# Altium PCB DONGLE01.PcbDoc
Units mil, origin at the board's own origin, x right, y up, seen from the top; angles counter-clockwise.
Board outline 2207 x 654 mil, 2 copper layers (Top, Bottom), stack 41.756 mil thick; 41 components, 27 nets, 134 pads, 83 vias.
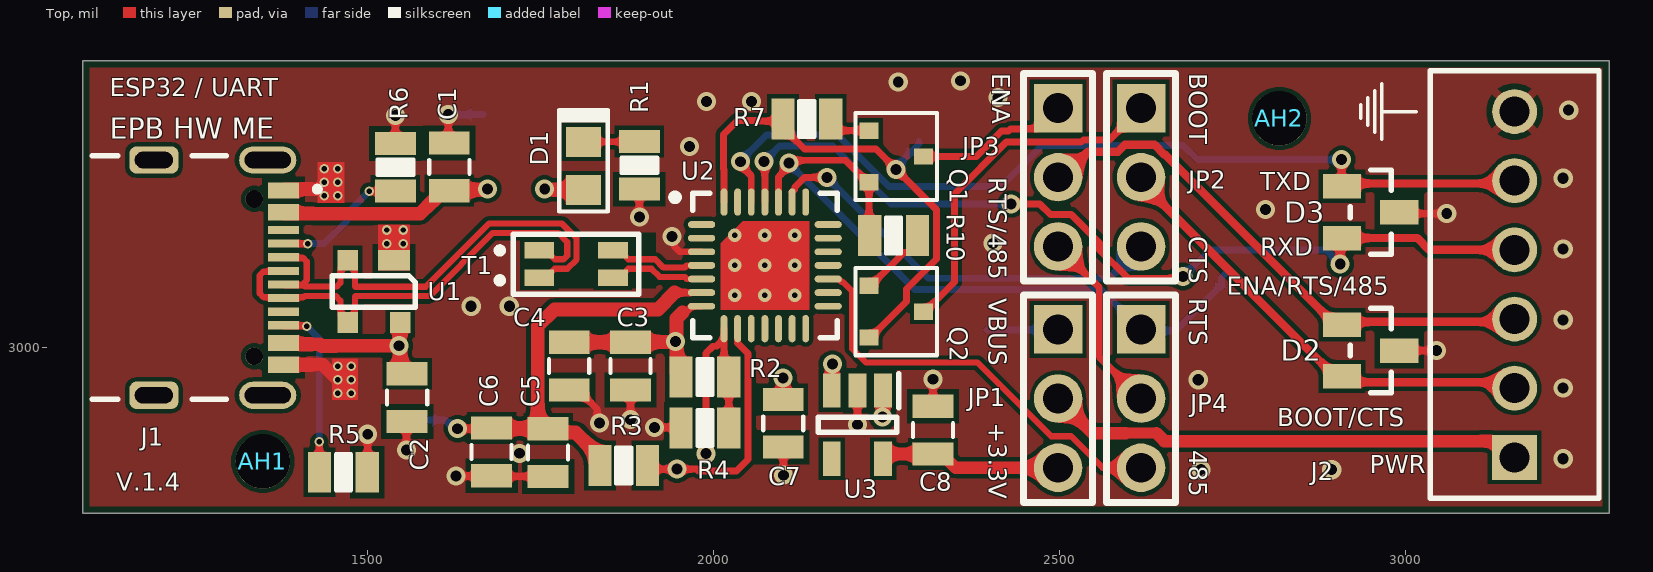
[diagram p0: Top view]
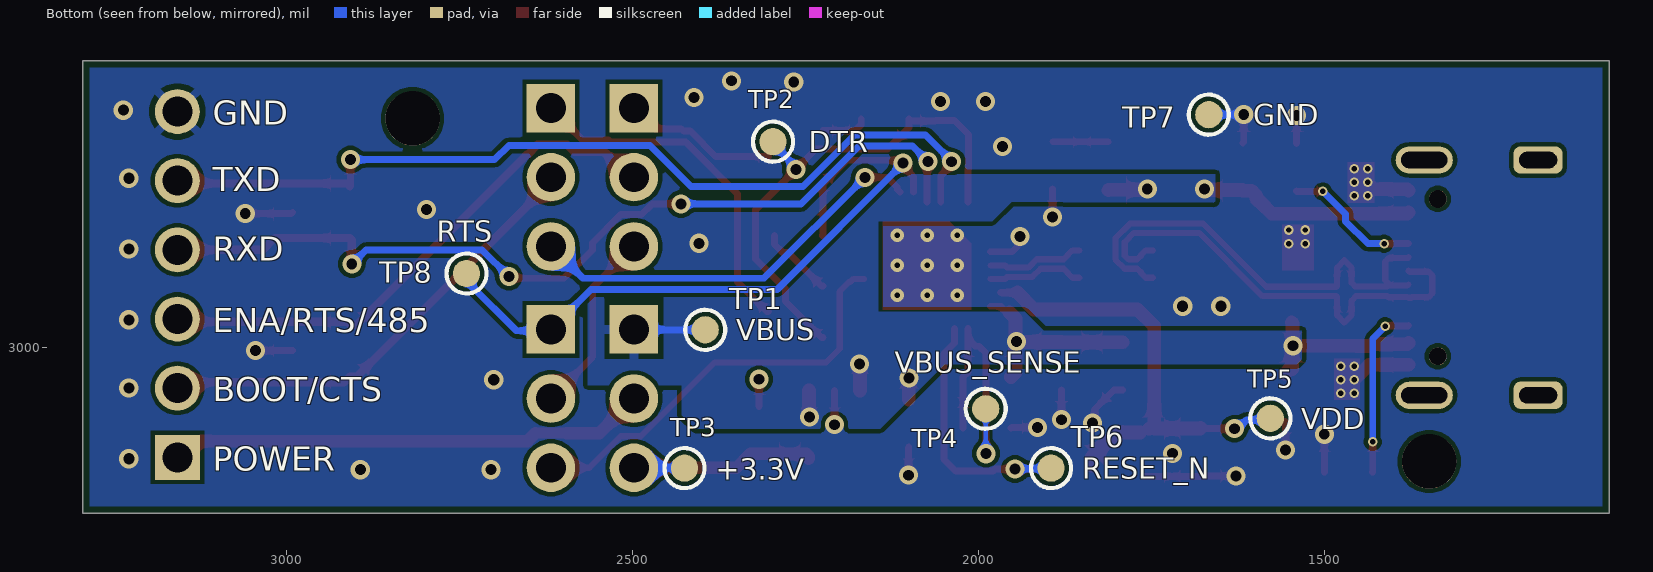
[diagram p1: Bottom view, seen from below]
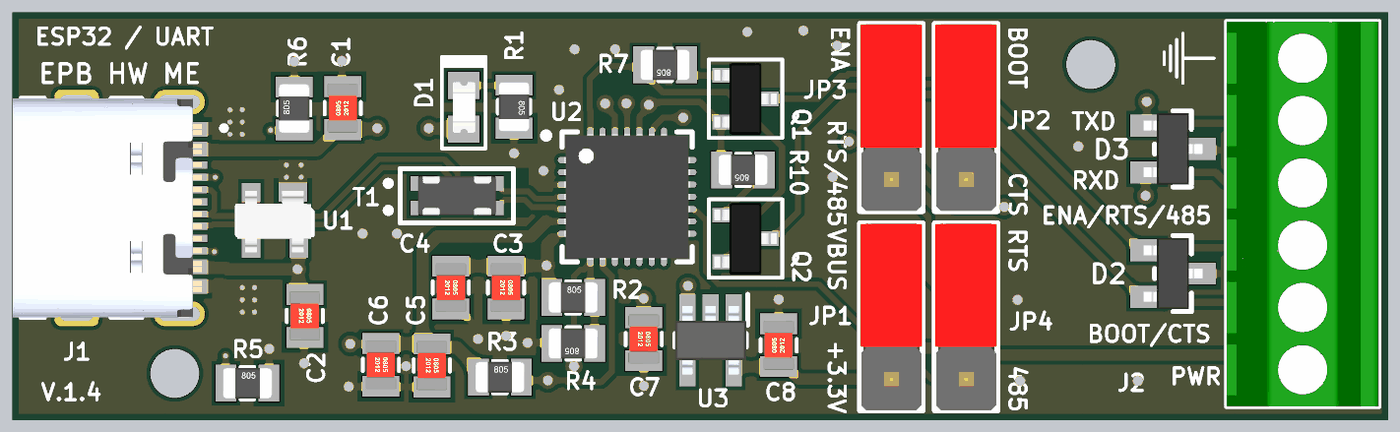
[diagram p2: 3D render of the assembled board from above, using the file's embedded part models]

## Layer stack, top to bottom
Top Solder: solder mask 1, SM-001, Dk 4
Top: signal copper 1.378
Dielectric 1: core 39, Core-042, Dk 4.6
Bottom: signal copper 1.378
Bottom Solder: solder mask 1, SM-001, Dk 4

## Board outline
1088,2760 1088,3414 3295,3414 3295,2760

## Design rules (kind name [scope] priority, off if disabled: settings)
BoardOutlineClearance [All] p1: gap=10 ignorepadtopadclearanceinfootprint=FALSE
Clearance [All vs not InAnyDifferentialPair] p1: gap=6 ignorepadtopadclearanceinfootprint=TRUE
DiffPairsRouting "Schematic Differential Pairs Routing_1" [InNetClass('USB')] p1: maxlimit=4.51 minlimit=4.51 mostfreqgap=4.51 toplayer_minwidth=9 toplayer_maxwidth=9 toplayer_prefwidth=9 bottomlayer_minwidth=9 bottomlayer_maxwidth=9 bottomlayer_prefwidth=9 impedanceprofiledriven=TRUE impedanceprofileid={0D77AD79-8F11-46E1-93D8-ED229D89D16F} impedanceprofilevalue=90.000000 maxuncoupledlength=500
DiffPairsRouting "Schematic Differential Pairs Routing" [InNetClass('USBi')] p2: maxlimit=4.51 minlimit=4.51 mostfreqgap=4.51 toplayer_minwidth=9 toplayer_maxwidth=9 toplayer_prefwidth=9 bottomlayer_minwidth=9 bottomlayer_maxwidth=9 bottomlayer_prefwidth=9 impedanceprofiledriven=TRUE impedanceprofileid={0D77AD79-8F11-46E1-93D8-ED229D89D16F} impedanceprofilevalue=90.000000 maxuncoupledlength=500
DiffPairsRouting [All] p3: maxlimit=4.51 minlimit=4.51 mostfreqgap=4.51 toplayer_minwidth=9 toplayer_maxwidth=9 toplayer_prefwidth=9 bottomlayer_minwidth=9 bottomlayer_maxwidth=9 bottomlayer_prefwidth=9 impedanceprofiledriven=TRUE impedanceprofileid={0D77AD79-8F11-46E1-93D8-ED229D89D16F} impedanceprofilevalue=90.000000 maxuncoupledlength=500
MinimumSolderMaskSliver [not InComponent('J1') and not InComponent('U2')] p1: minsoldermaskwidth=6
PolygonConnect [All] p1: thpad.connectstyle=Relief thpad.reliefconductorwidth=12 thpad.reliefentries=4 thpad.polygonreliefangle="90 Angle" thpad.airgapwidth=8 thpad.conductorbypadedge=TRUE thpad.mindistance=15 thpad.enablemindistance=FALSE smdpad.connectstyle=NoConnect smdpad.reliefconductorwidth=8 smdpad.reliefentries=4 smdpad.polygonreliefangle="90 Angle" smdpad.airgapwidth=8 via.connectstyle=Direct via.reliefconductorwidth=8 via.reliefentries=4 via.polygonreliefangle="90 Angle" via.airgapwidth=8
RoutingVias [All] p1: holewidth=15.75 width=27.56 viastyle="Through Hole" minholewidth=7.87 minwidth=13.78 maxholewidth=39.37 maxwidth=196.85
SMDEntry [All] p1: side=TRUE corner=TRUE anyangle=TRUE
SilkToSolderMaskClearance [IsPad] p1: minsilkscreentomaskgap=1 clearancetoexposedcopper=FALSE
SolderMaskExpansion Via [IsVia] p1: expansion=4 istentingtop=TRUE
SolderMaskExpansion Generic [All] p2: expansion=1 istentingtop=FALSE
SupplyNets "Schematic Supply Nets_3" [InNet('VDD')] p1: voltage=0.000
SupplyNets "Schematic Supply Nets_4" [InNet('+3.3V')] p2: voltage=0.000
SupplyNets "Schematic Supply Nets_2" [InNet('GND')] p3: voltage=0.000
SupplyNets "Schematic Supply Nets_1" [InNet('VBUS')] p4: voltage=0.000
UnRoutedNet [All] p1: checkbadconnections=TRUE
Width [All] p1: maxlimit=50 minlimit=3.94 preferedwidth=10
26 further rules are at their usual default settings.

## Classes and differential pairs
net class USB: DE_N DE_P
net class USBi: DI_N DI_P
differential pair DI: +DI_P -DI_N
differential pair DE: +DE_P -DE_N

## Components (designator, comment, footprint, x,y, rotation, side; value= is the part's Value field where it differs from the comment)
AH1 "Furo de Alinhamento" AH_2.0MMD 1348.43,2834.65 r0 top
AH2 "Furo de Alinhamento" AH_2.0MMD 2818.11,3330.55 r0 top
C1 "4,7uF" C0805 1617.94,3260.57 r180 top
C2 "4,7uF" C0805 1557,2927 r0 top
C3 "4,7uF" C0805 1879.92,2972.44 r0 top
C4 "0.1uF" C0805 1791.34,2972.44 r0 top
C5 "4,7uF" C0805 1760.83,2847.44 r0 top
C6 "0.1uF" C0805 1679.13,2848.43 r0 top
C7 "1uF" C0805 2100.79,2889.76 r0 top
C8 "2.2uF" C0805 2317.32,2879.92 r180 top
D1 "Blue Led 0805" "LED 0805" 1812.01,3261.81 r270 top
D2 "7V TVS" WE-TVS_SOT23-3L 2950,2995 r270 top
D3 "7V TVS" WE-TVS_SOT23-3L 2950,3195 r270 top
J1 "USB4105-GF-A-060" GCT_USB4105-GF-A-060 1190.94,3100.39 r270 top
J2 "MPT 0,5/ 6-2,54" 1725698 3158.11,2840.55 r90 top
JP1 "Header 3 Pin" JMP-3-PTH-180 2498.11,2925.55 r270 top
JP2 "Header 3 Pin" JMP-3-PTH-180 2618.11,3245.55 r270 top
JP3 "Header 3 Pin" JMP-3-PTH-180 2498.11,3245.55 r270 top
JP4 "Header 3 Pin" JMP-3-PTH-180 2618.11,2925.55 r270 top
Q1 "BSS64LT1G" SOT-23 2264.17,3275.59 r270 top
Q2 "BSS64LT1G" SOT-23 2264.17,3051.18 r270 top
R1 "180R" R0805 1892.72,3262.8 r0 top
R2 "21K" R0805 1987.6,2956.69 r90 top
R3 "1K07" R0805 1870.08,2828.74 r90 top
R4 "48K7" R0805 1987.6,2882.87 r270 top
R5 "5K1" R0805 1465,2819 r90 top
R6 "5K1" R0805 1540,3260 r180 top
R7 "10K" R0805 2135,3330 r270 top
R10 "10K" R0805 2260.24,3161.42 r270 top
T1 "CMC 370MA 2LN 90OHM SMD AEC-Q200" 744232090 1801.18,3120.08 r0 top
TP1 "" TP 2395,3025 r180 bottom
TP2 "" TP 2297,3297 r180 bottom
TP3 "" TP 2425,2825 r180 bottom
TP4 "" TP 1989.5,2910.83 r180 bottom
TP5 "" TP 1578,2897 r180 bottom
TP6 "" TP 1895,2825 r180 bottom
TP7 "" TP 1667,3336 r180 bottom
TP8 "" TP 2740.16,3106.3 r180 bottom
U1 "USB ESD protection" SOT143-4 1509.04,3080.46 r270 top
U2 "CP2102N-A02-GQFN28R" "QFN50P500X500X80_HS-29N CP2102N" 2074.21,3118.11 r0 top
U3 "3.3V 600mA PMIC" SOT94P280X100-5N 2208.07,2887.8 r270 top

## Footprints (in the part's own frame and the unit in brackets; to place one, negate y for a bottom-side part, rotate by r counter-clockwise, add the part's x,y. Pads: shape width x height; smd on the part's side, far side on the other; paste and mask are expansions set on the pad)
1725698 [mm]
  rect 1.65x1.65 hole 1.1: 1(0,0)
  round 1.65 hole 1.1: 2(2.54,0) 3(5.08,0) 4(7.62,0) 5(10.16,0) 6(12.7,0)
  silkscreen extent -1.5,-3.1 14.2,3.1, body extent -1.5,-3.1 14.2,3.1, height 8.61
744232090 [mm] "WURTH EMI FILTER 1206"
  rect 1.1x0.6 smd: 1(-1.35,-0.5) 2(1.35,-0.5) 3(1.35,0.5) 4(-1.35,0.5)
  silkscreen extent -2.9,-1.11 2.3,1.1, body extent -1.6,-0.8 1.6,0.8, height 1.15
AH_2.0MMD [mm] "Alignment Hole M2"
  round 2 hole 2 unplated: 1(0,0)
C0805 [mm]
  rect 1.5x0.85 smd mask+0.05: 1(0,0.875) 2(0,-0.875)
  silkscreen extent -0.74,-0.25 0.74,0.25, body extent -0.62,-1 0.63,1, height 0.9
GCT_USB4105-GF-A-060 [mm]
  rect 0.6x1.15 smd: A1_B12(-3.2,4.755) A4_B9(-2.4,4.755) B1_A12(3.2,4.755) B4_A9(2.4,4.755)
  rect 0.3x1.15 smd: A5(-1.25,4.755) A6(-0.25,4.755) A7(0.25,4.755) A8(1.25,4.755) B5(1.75,4.755) B6(0.75,4.755) B7(-0.75,4.755) B8(-1.75,4.755)
  oval 1x2.1 hole 0.6 slot 1.7 at 90 deg: SH1(-4.32,4.18) SH2(4.32,4.18)
  rrect50% 1x1.8 hole 0.6 slot 1.4 at 90 deg: SH3(-4.32,0) SH4(4.32,0)
  round 0.65 hole 0.65 unplated: ""(-2.89,3.68) ""(2.89,3.68)
  silkscreen extent -4.47,-2.26 4.47,6.1, body extent -4.47,-2.6 4.47,5.11, height 3.31
JMP-3-PTH-180 [mil] "Jumper 3 pinos PTH 180º passo 2.54mm"
  rect 70x70 hole 43: 1(-100,0)
  round 70 hole 43: 2(0,0) 3(100,0)
  silkscreen extent -150,-50 150,50, body extent -150,-49 150,49, height 323
"LED 0805" [mm]
  rect 1.1x1.3 smd mask+0.051: A(0.889,0) K(-0.889,0)
  silkscreen extent -2.06,-0.89 1.68,0.89, body extent -1.03,-0.44 1.03,0.47, height 0.85
"QFN50P500X500X80_HS-29N CP2102N" [mm] "QFN, 28-Leads, Body 5,00x5,00mm, Pitch 0,50mm, Thermal Pad 3,25x3,25mm, IPC Medium Density"
  oval 1x0.25 smd: 1(-2.325,1.5) 2(-2.325,1) 3(-2.325,0.5) 4(-2.325,0) 5(-2.325,-0.5) 6(-2.325,-1) 7(-2.325,-1.5) 15(2.325,-1.5) 16(2.325,-1) 17(2.325,-0.5) 18(2.325,0) 19(2.325,0.5) 20(2.325,1) 21(2.325,1.5)
  oval 0.25x1 smd: 8(-1.5,-2.325) 9(-1,-2.325) 10(-0.5,-2.325) 11(0,-2.325) 12(0.5,-2.325) 13(1,-2.325) 14(1.5,-2.325) 22(1.5,2.325) 23(1,2.325) 24(0.5,2.325) 25(0,2.325) 26(-0.5,2.325) 27(-1,2.325) 28(-1.5,2.325)
  round 0.025 smd: 29(0,0)
  Top region: -1.625,-1.625 -1.625,0.813 -0.813,1.625 1.625,1.625 1.625,-1.625
  silkscreen extent -3.42,-2.65 2.65,2.65, body extent -2.55,-2.55 2.55,2.55, height 0.8
R0805 [mm]
  rect 1.5x0.85 smd mask+0.05: 1(0,0.875) 2(0,-0.875)
  silkscreen extent -0.66,-0.28 0.66,0.28, body extent -0.62,-1 0.63,1, height 0.78
SOT94P280X100-5N [mm]
  rect 1.25x0.65 smd: 1(-1.25,0.94) 2(-1.25,0) 3(-1.25,-0.94) 4(1.25,-0.94) 5(1.25,0.94)
  silkscreen extent -1.88,-1.45 0.28,1.51, body extent -1.4,-1.45 1.4,1.45, height 1
SOT143-4 [mil]
  rect 30x46 smd: 1(-45,29)
  rect 30x30 smd: 2(-45,-38) 3(45,-38) 4(45,38)
  silkscreen extent -23,-60 23,60, body extent -47,-60 51,58, height 41
SOT-23 [mm]
  rect 0.6x0.7 smd: 1(-0.95,-1) 2(0.95,-1) 3(0,1)
  silkscreen extent -1.6,-1.5 1.6,1.5, body extent -1.46,-1.27 1.46,1.27, height 0.95
TP [mm] "Test Point SMD 1mm"
  round 1 smd paste-0.457 mask+0.051: 1(0,0)
  silkscreen extent -0.74,-0.74 0.73,0.74
WE-TVS_SOT23-3L [mm]
  rect 0.9x1.4 smd: 1(-0.95,-1.05) 2(0.95,-1.05) 3(0,1.05)
  silkscreen extent -1.55,-0.75 1.55,0.75, body extent -1.45,-1.2 1.45,1.2, height 1.04

## Part data
AH1 AH2: library part "Aligment Hole M2", RefDes=RefDes
C1 C2 C3 C5: library part CAP, "4.7 µF ±5% 25V Capacitor de cerâmica X7R 0805 (métrico 2012)", Manufacturer=KEMET, Manufacturer P/N=C0805C475J3RACTU, Datasheet=https://www.yageogroup.com/content/datasheet/asset/file/KEM_C1002_X7R_SMD, Info="25V 5% X7R", RefDes=RefDes, Supplier=Digikey, Supplier P/N (CT)=399-C0805C475J3RACTUCT-ND, Supplier P/N (TR)=399-C0805C475J3RACTUTR-ND, Supplier Web Page=https://www.digikey.com.br/pt/products/detail/kemet/C0805C475J3RACTU/12700961
C4 C6: library part CAP, "0.1 µF ±10% 100V Ceramic Capacitor X7R 0805 (2012 Metric)", Manufacturer="Murata Electronics", Manufacturer P/N=GCM21BR72A104KA37L, Datasheet=https://search.murata.co.jp/Ceramy/image/img/A01X/G101/ENG/GCM033R71A103KA03-01A.pdf, Info=MLCC, RefDes=RefDes, Supplier=Digikey, Supplier P/N (Cut Tape)=490-4789-1-ND, Supplier P/N (Tape & Reel)=490-4789-2-ND, Supplier Web Page=https://www.digikey.com/en/products/detail/murata-electronics/GCM21BR72A104KA37L/1641663?s=N4IgTCBcDaICwE4AMBaOB2AHAlA2FAcgCIgC6AvkA
C7: library part CAP, "1 µF ±5% 16V Ceramic Capacitor X7R 0805 (2012 Metric)", Manufacturer=KEMET, Manufacturer P/N=C0805C105J4RAC7800, Datasheet=https://connect.kemet.com:7667/gateway/IntelliData-ComponentDocumentation/1.0/download/datasheet/C0805C105J4RACTU, Info=MLCC, RefDes=RefDes, Supplier=Digikey, Supplier P/N (Cut Tape)=399-C0805C105J4RAC7800CT-ND, Supplier P/N (Tape & Reel)=399-C0805C105J4RAC7800TR-ND, Supplier Web Page=https://www.digikey.com/en/products/detail/kemet/C0805C105J4RAC7800/2211759?s=N4IgTCBcDaIMIAYAcCCscCMaBSAWASgIJwDsKCIAugL5A
C8: library part CAP, "2.2 µF ±5% 16V Ceramic Capacitor X7R 0805 (2012 Metric)", Manufacturer=KEMET, Manufacturer P/N=C0805C225J4REC7800, Datasheet=https://content.kemet.com/datasheets/KEM_C1090_X7R_ESD.pdf, Info=MLCC, RefDes=RefDes, Supplier=Digikey, Supplier P/N (Cut Tape)=399-C0805C225J4REC7800CT-ND, Supplier P/N (Tape & Reel)=399-C0805C225J4REC7800TR-ND, Supplier Web Page=https://www.digikey.com/en/products/detail/kemet/C0805C225J4REC7800/8643702?s=N4IgTCBcDaIMIAYAcCCscxlQKQCwCUBROAdhQRAF0BfIA
D1: library part "LED GREEN 0805", "Blue 470nm LED Indication - Discrete 3.2V 0805 (2012 Metric)", Manufacturer="Würth Elektronik", Manufacturer P/N=150080BS75000, Datasheet=https://www.we-online.com/components/products/datasheet/150080BS75000.pdf, Info="Id = 0.5 Inom (10mA)", RefDes=RefDes, Supplier=Digikey, Supplier P/N (Cut Tape)=732-4982-1-ND, Supplier P/N (Tape & Reel)=732-4982-2-ND, Supplier Web Page=https://www.digikey.com/en/products/detail/w%C3%BCrth-elektronik/150080BS75000/4489912
D2 D3: library part WE-TVS_SOT23-3L_824021, "7V Clamp 15A (8/20µs) Ipp Tvs Diode Surface Mount SOT-23-3", Manufacturer="Würth Elektronik", Manufacturer P/N=824021, Datasheet=https://www.we-online.com/components/products/datasheet/824021.pdf, Info="TVS Diode", RefDes=RefDes, Supplier=Digikey, Supplier P/N (Cut Tape)=732-4468-1-ND, Supplier P/N (Tape & Reel)=732-4468-2-ND, Supplier Web Page=https://www.digikey.com/en/products/detail/w%C3%BCrth-elektronik/824021/3900544
J1: "USB-C (USB TYPE-C) USB 2.0 Receptacle Connector 24 (16+8 Dummy) Position Surface Mount, Right Angle; Through Hole", Manufacturer="Global Connector Technology", Datasheet=https://www.mouser.com/catalog/specsheets/Global_Connector_Technology_usb4105.pdf, Info="USB4105 - Type C USB 2.0 Connector", Manufacturer P/N=USB4105-GF-A-060, Supplier=Digikey, Supplier P/N (CT)=2073-USB4105-GF-ACT-ND, Supplier P/N (DR)=2073-USB4105-GF-ADKR-ND, Supplier P/N (TR)=2073-USB4105-GF-ATR-ND, Supplier Web=https://www.digikey.com.br/pt/products/detail/gct/USB4105-GF-A/11198441
J2: library part 691322110006, "6 Position Wire to Board Terminal Block Horizontal with Board 0.100\" (2.54mm) Through Hole", Manufacturer="Phoenix Contact", Manufacturer P/N=1725698, Datasheet=https://www.phoenixcontact.com/en-us/products/printed-circuit-board-terminal-mpt-05-6-254-1725698?type=pdf, Info="Borne 6pos 6A e=2,54", RefDes=RefDes, Supplier=Digikey, Supplier P/N (Cut Tape)=277-1277-ND, Supplier P/N (Tape & Reel)=277-1277-ND, Supplier Web Page=https://www.digikey.com/en/products/detail/phoenix-contact/1725698/267466
JP1 JP2 JP3 JP4: library part "Jumper 3", "3 Pin Jumper", Manufacturer="Würth Elektronik", Manufacturer P/N=61300311121, Datasheet=https://www.we-online.com/components/products/datasheet/61300311121.pdf, Info="0.1\" Pin header 1x3", RefDes=RefDes, Supplier=Digikey, Supplier P/N (Cut Tape)=732-5316-ND, Supplier P/N (Tape & Reel)=732-5316-ND, Supplier Web Page=https://www.digikey.com/en/products/detail/w%C3%BCrth-elektronik/61300311121/4846825
Q1 Q2: library part TR-NPN-BC817-SOT23, "Bipolar (BJT) Transistor NPN 80 V 100 mA 60MHz 225 mW Surface Mount SOT-23-3 (TO-236)", Manufacturer=onsemi, Datasheet=https://www.onsemi.com/pdf/datasheet/bss64lt1-d.pdf, Info="VCEsat max 200mV", Manufacturer P/N=BSS64LT1G, RefDes=RefDes, Supplier=Digikey, Supplier P/N (Cut Tape)=BSS64LT1GOSCT-ND, Supplier P/N (Tape & Reel)=BSS64LT1GOSTR-ND, Supplier Web Page=https://www.digikey.com/en/products/detail/onsemi/BSS64LT1G/1476267?s=N4IgTCBcDaIEIGUEDYAsAZAKgRgOIgF0BfIA
R1: library part RESISTOR, "180 Ohms ±1% 0.25W, 1/4W Chip Resistor 0805 (2012 Metric) Anti-Sulfur Thin Film", Manufacturer="Stackpole Electronics Inc", Manufacturer P/N=RNCP0805FTD180R, Datasheet=https://www.seielect.com/catalog/sei-rncp.pdf, Info="1% 100 PPM", RefDes=RefDes, Supplier=Digikey, Supplier P/N (Cut Tape)=RNCP0805FTD180RCT-ND, Supplier P/N (Tape & Reel)=RNCP0805FTD180RTR-ND, Supplier Web Page=https://www.digikey.com/en/products/detail/stackpole-electronics-inc/RNCP0805FTD180R/2240212
R2: library part RESISTOR, "21 kOhms ±1% 0.125W, 1/8W Chip Resistor 0805 (2012 Metric) Moisture Resistant Thick Film", Manufacturer=YAGEO, Manufacturer P/N=RC0805FR-0721KL, Datasheet=https://www.yageo.com/upload/media/product/products/datasheet/rchip/PYu-RC_Group_51_RoHS_L_12.pdf, Info="1% 100 PPM", RefDes=RefDes, Supplier=Digikey, Supplier P/N (Cut Tape)=311-21.0KCRCT-ND, Supplier P/N (Tape & Reel)=311-21.0KCRTR-ND, Supplier Web Page=https://www.digikey.com/en/products/detail/yageo/RC0805FR-0721KL/727728
R3: library part RESISTOR, "1.07 kOhms ±1% 0.125W, 1/8W Chip Resistor 0805 (2012 Metric) Automotive AEC-Q200 Thick Film", Manufacturer="Vishay Dale", Manufacturer P/N=CRCW08051K07FKEA, Datasheet=https://www.vishay.com/docs/20035/dcrcwe3.pdf, Info="1% 100 PPM", RefDes=RefDes, Supplier=Digikey, Supplier P/N (Cut Tape)=541-1.07KCCT-ND, Supplier P/N (Tape & Reel)=541-1.07KCTR-ND, Supplier Web Page=https://www.digikey.com/en/products/detail/vishay-dale/CRCW08051K07FKEA/1175640
R4: library part RESISTOR, "48.7 kOhms ±1% 0.125W, 1/8W Chip Resistor 0805 (2012 Metric) Moisture Resistant Thick Film", Manufacturer=YAGEO, Manufacturer P/N=RC0805FR-0748K7L, Datasheet=https://www.yageo.com/upload/media/product/products/datasheet/rchip/PYu-RC_Group_51_RoHS_L_12.pdf, Info="1% 100 PPM", RefDes=RefDes, Supplier=Digikey, Supplier P/N (Cut Tape)=311-48.7KCRCT-ND, Supplier P/N (Tape & Reel)=311-48.7KCRTR-ND, Supplier Web Page=https://www.digikey.com/en/products/detail/yageo/RC0805FR-0748K7L/727981
R5 R6: library part RESISTOR, "5.1 kOhms ±1% 0.125W, 1/8W Chip Resistor 0805 (2012 Metric) Moisture Resistant Thick Film", Manufacturer=YAGEO, Manufacturer P/N=RC0805FR-075K1L, Datasheet=https://www.yageo.com/upload/media/product/products/datasheet/rchip/PYu-RC_Group_51_RoHS_L_12.pdf, Info="1% 100 PPM", RefDes=RefDes, Supplier=Digikey, Supplier P/N (Cut Tape)=311-5.10KCRCT-ND, Supplier P/N (Tape & Reel)=311-5.10KCRTR-ND, Supplier Web Page=https://www.digikey.com/en/products/detail/yageo/RC0805FR-075K1L/727988
R7 R10: library part RESISTOR, "10 kOhms ±1% 0.125W, 1/8W Chip Resistor 0805 (2012 Metric) Automotive AEC-Q200 Thick Film", Manufacturer="Stackpole Electronics Inc", Manufacturer P/N=RMCF0805FT10K0, Datasheet=https://www.seielect.com/catalog/sei-rmcf_rmcp.pdf, Info="1% 100PPM", RefDes=RefDes, Supplier=Digikey, Supplier P/N (Cut Tape)=RMCF0805FT10K0CT-ND, Supplier P/N (Tape & Reel)=RMCF0805FT10K0TR-ND, Supplier Web Page=https://www.digikey.com/en/products/detail/stackpole-electronics-inc/RMCF0805FT10K0/1760676
T1: library part "USB EMI FILTER", "2 Line Common Mode Choke Surface Mount 90 Ohms @ 100 MHz 370mA DCR 300mOhm", Manufacturer="Würth Elektronik", Manufacturer P/N=744232090, Datasheet=https://www.we-online.com/components/products/datasheet/744232090.pdf, Info="EMI Trafo", RefDes=RefDes, Supplier=Digikey, Supplier P/N (Cut Tape)=732-1469-1-ND, Supplier P/N (Tape & Reel)=732-1469-2-ND, Supplier Web Page=https://www.digikey.com/en/products/detail/w%C3%BCrth-elektronik/744232090/1638873?s=N4IgTCBcDaIOwGYwFoCMAWAbATmZ5AcgCIgC6AvkA
TP1 TP2 TP3 TP4 TP5 TP6 TP7 TP8: library part TESTPOINT
  TP1 TP7 TP8: RefDes=rRefDes, Supplier=Digikey
  TP2 TP3 TP4 TP5 TP6: RefDes=RefDes
U1: library part USB2.0_TVS_DIODES, "Clamp Ipp Tvs Diode Surface Mount SOT-143", Manufacturer="Diodes Incorporated", Manufacturer P/N=DRTR5V0U2SR-7, Datasheet=https://www.diodes.com/assets/Datasheets/DRTR5V0U2SR.pdf, Info="ESD Protection Device", RefDes=RefDes, Supplier=Digikey, Supplier P/N (Cut Tape)=DRTR5V0U2SR-7DICT-ND, Supplier P/N (Tape & Reel)=DRTR5V0U2SR-7DITR-ND, Supplier Web Page=https://www.digikey.com/en/products/detail/diodes-incorporated/DRTR5V0U2SR-7/4402528
U2: library part "CP2102N QFN28", "USB Bridge, USB to UART USB 2.0 UART Interface 28-QFN (5x5)", Manufacturer="Silicon Labs", Datasheet=https://www.silabs.com/documents/public/data-sheets/cp2102n-datasheet.pdf, Info=CP2102N-A02-GQFN28R, Manufacturer P/N=CP2102N-A02-GQFN28R, RefDes=RefDes, Supplier=Digikey, Supplier P/N (Cut Tape)=336-5890-1-ND, Supplier P/N (Tape & Reel)=336-5890-2-ND, Supplier Web Page=https://www.digikey.com/en/products/detail/silicon-labs/CP2102N-A02-GQFN28R/9863480
U3: library part RT9080-33GJ5, "Linear Voltage Regulator IC Positive Fixed 1 Output 600mA TSOT-23-5", Manufacturer="Richtek USA Inc.", Datasheet=https://www.richtek.com/assets/product_file/RT9080/DS9080-05.pdf, Info="3.3V 600mA PMIC", Manufacturer P/N=RT9080-33GJ5, RefDes=RefDes, Supplier=Digikey, Supplier P/N (Cut Tape)=1028-1509-1-ND, Supplier P/N (Tape & Reel)=1028-1509-2-ND, Supplier Web Page=https://www.digikey.com/en/products/detail/richtek-usa-inc/RT9080-33GJ5/6161634?s=N4IgTCBcDaIEoBUCcAGAHCgtAZmwcQCkBWEAXQF8g

## Via types
v1: diameter 27.56, hole 15.75, Top to Bottom, tented both sides, 40 vias
v2: diameter 13.78, hole 7.87, Top to Bottom, tented both sides, 20 vias
v3: diameter 28, hole 16, Top to Bottom, tented both sides, 14 vias
v4: diameter 19.68, hole 7.87, Top to Bottom, tented both sides, 9 vias

## Nets (pads, with @x,y where several pads share a name; then routed paths per layer and width w, separated by ;. In a path a pad name is that pad's centre, name@x,y a point inside that pad or via, vN(x,y) a via of type N, cw(c..) or ccw(c..) an arc to the next point about the centre after c; other vN are vias at no path point)
+3.3V: C8.1 JP1.3 TP3.1 U3.5 | length 339.3
  Top w18: U3.5 2245.08,2841.68 2248.87,2845.47 C8.1 2330.12,2845.47 2350.04,2825.55 JP1.3
  Bottom w10: TP3.1 2425.28,2825.28 2497.83,2825.28 JP1.3
BOOT: JP2.1 Q2.3 | length 511.1
  Top w10: Q2.3 2305.51,3051.18 2348.22,3093.89 2348.22,3221.26 2423.18,3296.22 2531.51,3296.22 2534.84,3299.55 2572.11,3299.55 JP2.1
BOOT.CTS: D2.2 J2.2 JP2.2 | length 670.6
  Top w12: JP2.2 2618.11,3238.31 2898.82,2957.6 D2.2 2917.18,2949.07 3149.59,2949.07 J2.2
CTS: JP2.3 U2.23 | length 594.3
  Top w10: U2.23@2113.66,3224.33 2117.35,3228.02 2117.35,3231 2131.66,3245.32 v1(2164.17,3245.32)
  Bottom w10: v1(2164.17,3245.32) 2309.94,3099.55 2572.11,3099.55 JP2.3
DE_N: J1.A7 J1.B7 T1.1 U1.2 | length 698.6
  Top w9: J1.A7 1379.56,3089.15 1407.51,3089.15 1409.19,3087.46 1455.27,3087.46 1460.54,3092.73 1460.54,3114.96 U1.2 1481.54,3114.96 1481.54,3088.08 1482.41,3087.21 1583.88,3087.21 1675.25,3178.58 1780.87,3178.58 1801.96,3157.49 1801.96,3126.51 1788.78,3113.33 1770.46,3113.33 1765.19,3108.05 1765.19,3107.7 1757.87,3100.39 T1.1 ; J1.B7 1379.21,3128.86 1406.73,3128.86 1412,3123.59 1412,3096.88 1406.73,3091.61
DE_P: J1.A6 J1.B6 T1.4 U1.3 | length 679.5
  Top w9: J1.B6@1374.99,3070.87 1373.58,3072.27 1349.27,3072.27 1344,3077.54 1344,3103.56 1349.27,3108.83 1376.74,3108.83 J1.A6 ; J1.B6 1379.56,3072.27 1407.51,3072.27 1409.19,3073.96 1453.75,3073.96 1460.54,3067.17 1460.54,3045.96 U1.3 1481.54,3045.96 1481.54,3072.84 1482.41,3073.7 1589.48,3073.7 1680.85,3165.07 1775.28,3165.07 1788.46,3151.89 1788.46,3132.1 1783.19,3126.83 1770.46,3126.83 1765.19,3132.1 1765.19,3132.45 1757.87,3139.76 T1.4
DI_N: T1.2 U2.5 | length 140.1
  Top w9: T1.2 1864.17,3100.39 1871.48,3107.7 1871.48,3108.05 1876.76,3113.33 1910.22,3113.33 1922.03,3101.51 1958.46,3101.51 1961.39,3098.59 1982.52,3098.59 U2.5
DI_P: T1.3 U2.4 | length 140.1
  Top w9: T1.3 1864.17,3139.76 1871.48,3132.45 1871.48,3132.1 1876.76,3126.83 1915.82,3126.83 1927.63,3115.02 1958.46,3115.02 1961.39,3117.95 1982.52,3117.95 U2.4
DTR: Q2.2 R7.2 TP2.1 U2.28 | length 758.4
  Top w10: U2.28 2015.16,3256.8 2014.22,3257.74 2014.22,3307.26 2034.74,3327.78 2061.28,3327.78 2062.28,3326.78 2097.33,3326.78 R7.2 2100.55,3317.2 2131.66,3286.1 2234.9,3286.1 2322.42,3198.58 2322.42,3127.33 2278.76,3083.68 2278.76,3065.77 2226.77,3013.78 Q2.2
  Bottom w10: v1(2264,3257) 2264,3260.5 2297,3293.5 TP2.1
ENA: JP3.1 Q1.3 | length 223.5
  Top w10: Q1.3 2379.92,3275.59 2416.55,3312.22 2426.26,3312.22 2429.59,3315.55 2468.11,3315.55 JP3.1
ENA.RTS.485: D2.1 J2.3 JP3.2 | length 790.6
  Top w12: JP3.2 2504.88,3245.55 2541.88,3282.55 2584.73,3282.55 2594.73,3292.55 2637.58,3292.55 2652.13,3278 2653.22,3278 2898.82,3032.4 D2.1 2912.74,3036.48 3154.04,3036.48 J2.3
GND: C1.2 C2.2 C3.2 C4.2 C5.2 C6.2 C7.2 C8.2 D2.3 D3.3 J1.A1_B12 J1.B1_A12 J2.6 R1.2 R4.2 R5.2 R6.2 TP7.1 U1.1 U2.3 U2.29 U3.2 | length 1024
  Top w10: v2@1436.28,3219.23 v2(1437.01,3218.5) ; R5.2 1500,2819.55 v1(1500,2874) ; R6.2 v1(1540,3335) ; v1(1556,2851) 1556,2891.55 C2.2 ; v1(1616.47,3336.28) 1616.47,3296.49 C1.2 ; v1(1627.45,2813.52) 1678.68,2813.52 C6.2 1680.12,2812.99 C5.2 ; C4.2 1804.13,2937.99 1831.64,2910.49 1831.64,2893.36 v1(1835,2890) ; C3.2 1880,2937.91 v1(1880,2895) ; v1(1892.72,3187.99) R1.2 ; v1(1914.51,2883.99) 1952.03,2883.99 R4.2 ; v1(1940,3160) 1943.36,3156.64 1943.36,3145.64 1951.2,3137.8 U2.3 ; C7.2 2101.03,2855.07 v1(2101.03,2814.76) ; v1(2208.07,2887.8) U3.2 ; C8.2 2317.37,2914.41 v1(2317.37,2953.5) ; D2.3 v1(3045,2995) ; D3.3 2993.34,3193 v1(3060,3193)
  Top w19.68: J1.B1_A12 1435.04,2974.41 v2(1456.69,2952.76) ; J1.A1_B12 1380.12,3228.35 1428.73,3228.35 1437.01,3236.62 v2(1437.01,3238.19)
  Bottom w10: v1(1616.47,3336.28) 1616.61,3336.14 1666.86,3336.14 TP7.1
  other v1: 1719.49,2846.46 1965,3290 1990,3355 2055,3355 2411,3361 2267,3383 2357,3385
  other v2: 1456.69,2933.07 1476.38,2933.07 1476.38,2952.76 1456.69,2972.44 1476.38,2972.44 1527.56,3149.61 1551.18,3149.61 1527.56,3169.29 1551.18,3169.29 1456.69,3218.5 1456.69,3238.19 1437.01,3257.87 1456.69,3257.87
  other v3: 2704.72,2822.83 2893.7,2822.83 3228.35,2838.58 3228.35,2940.94 2700.79,2952.76 3228.35,3039.37 1649.61,3059.06 1704.72,3059.06 3228.35,3141.73 2404,3150 2798,3199 3228.35,3244.09 3236.22,3342.52
  other v4: 2030.91,3074.8 2074.21,3074.8 2117.52,3074.8 2030.91,3118.11 2074.21,3118.11 2117.52,3118.11 2030.91,3161.42 2074.21,3161.42 2117.52,3161.42
NetD1_K: D1.K R1.1 | length 80.9
  Top w9: D1.K 1892.28,3296.81 R1.1
NetJ1_A5: J1.A5 R6.1 | length 199.4
  Top w10: J1.A5 v2(1413.39,3149.61) ; v2(1502,3225) 1539.45,3225 R6.1
  Bottom w10: v2(1413.39,3149.61) 1437.01,3149.61 1469.14,3181.74 1469.14,3192.14 v2(1502,3225)
NetJ1_B5: J1.B5 R5.1 | length 253.2
  Top w10: J1.B5 1378.92,3030.72 1411.28,3030.72 v2(1412,3030) ; v2(1430,2863) 1430,2819.55 R5.1
  Bottom w10: v2(1412,3030) 1430,3012 v2(1430,2863)
NetQ1_1: Q1.1 R7.1 | length 67
  Top w10: R7.1 2169.45,3322.09 2178.54,3312.99 Q1.1
NetQ2_1: Q2.1 R10.1 | length 107.5
  Top w10: Q2.1 2226.77,3088.58 2275.08,3136.89 2282.95,3136.89 2294.69,3148.62 R10.1
PWR: J2.1 JP1.2 | length 695.2
  Top w16: 2595.99,2875.55 2640.24,2875.55
  Top w18: JP1.2 2548.11,2875.55 2595.99,2875.55 ; 2640.24,2875.55 2651.75,2864.03 3134.63,2864.03 J2.1
RESET_N: R3.2 TP6.1 U2.9 | length 403
  Top w10: R3.2 1909.76,2823.51 1976,2823.51 1978.5,2821 2033,2821 2049.78,2837.78 2049.78,2990.78 2034.92,3005.64 2034.92,3026.5 U2.9
  Bottom w10: TP6.1 1895.75,2824.25 1946.29,2824.25 v1(1947.03,2823.51)
RS485: JP4.3 U2.17 | length 614
  Top w9: U2.17 2180.74,3098.43 2185,3094.16 2186.9,3094.16 2200.52,3080.54 2200.52,2997.62 2220.36,2977.78 2381.53,2977.78 2488.26,2871.05 2516.96,2871.05 2562.46,2825.55 JP4.3
RTS: JP4.1 Q1.2 R10.2 TP8.1 U2.24 | length 1027.2
  Top w10: U2.24@2093.9,3224.33 2093.9,3246.15 2109,3261.25 v1(2109,3266) 2113.75,3266 2117.85,3270.1 2190.92,3270.1 2222.83,3238.19 Q1.2 ; Q1.2@2224.8,3237.2 2224.8,3162.4 R10.2
  Bottom w10: v1(2109,3266) 2109,3265.44 2290.89,3083.55 2560.11,3083.55 2620.04,3023.62 2668.11,3023.62 2734.54,3090.05 2734.54,3100.68 TP8.1
RTS.485: JP3.3 JP4.2 | length 269.7
  Top w10: JP3.3 2557.66,3086 2557.66,2986 JP4.2
RXD: D3.2 J2.4 U2.25 | length 1307.1
  Top w10: v1(2072.99,3268.2) 2074.13,3267.06 2074.13,3209.72 U2.25 ; v1(2430,3207) 2471.61,3207 2487.06,3191.55 2517.16,3191.55 2558.11,3150.61 2558.11,3140.5 2599.06,3099.55 2676.55,3099.55 v1(2679,3102)
  Top w12: v1(2906,3120) 2906,3154.94 D3.2 3017.55,3157.6 3034.6,3140.55 J2.4
  Bottom w10: v1@2072.99,3268.65 2073.44,3268.65 2095.57,3290.78 2172.55,3290.78 2256.33,3207 v1(2430,3207) ; v1(2679,3102) 2717.55,3140.55 2885.45,3140.55 v1(2906,3120)
TXD: D3.1 J2.5 U2.26 | length 1306.3
  Top w10: v1(2039,3268) 2039,3263.25 2054.53,3247.72 U2.26 ; v1(2908,3271) 2908,3233.06 D3.1
  Top w12: D3.1 2912.74,3236.48 3154.04,3236.48 J2.5
  Bottom w10: v1(2039,3268) 2039,3269.25 2076.53,3306.78 2179.18,3306.78 2253.74,3232.22 2415.78,3232.22 2475.12,3291.55 2678.91,3291.55 2699.46,3271 v1(2908,3271)
VBUS: C1.1 C2.1 C3.1 C4.1 C7.1 D1.A J1.A4_B9 J1.B4_A9 JP1.1 R2.1 TP1.1 U1.4 U2.7 U3.1 U3.3 | length 1118
  Top w10: 1955,3050 1959.02,3050 1968.07,3059.06 U2.7
  Top w19.65: 1508.31,3192.82 1508.48,3192.99 1576.08,3192.99 1585.53,3202.44
  Top w20: J1.B4_A9 1379.96,3004.09 1430.79,3004.09 1433.18,3001.7 1453.79,3001.7 1454.06,3001.97 v1(1545.28,3001.97) ; J1.A4_B9 1379.96,3193.07 1420.13,3193.07 1420.54,3192.66 1508.15,3192.66 1508.31,3192.82 ; U1.4 1546.16,3034.58 1546.16,3002.85 v1(1545.28,3001.97) ; C2.1 1550.27,2968.18 1546.72,2968.18 1546.72,3000.52 v1(1545.28,3001.97) ; 1585.53,3202.44 1598.42,3215.33 1598.42,3219.39 1605.15,3226.12 C1.1 1619.06,3227.23 1672.11,3227.23 v1(1673.23,3228.35) ; v1(1755.91,3228.35) 1756.67,3227.58 1811.24,3227.58 D1.A ; C4.1 C3.1 1880.41,3007.38 1944.39,3007.38 v1(1944.88,3007.87) ; R2.1 1946.42,2963.43 1946.42,3004.29 1944.88,3005.83 v1(1944.88,3007.87) ; 1955,3050 1946.33,3041.33 1946.33,3009.32 v1(1944.88,3007.87) ; v1(2100.66,2955.11) 2100.72,2955.05 2100.72,2924.28 C7.1 ; U3.3 2171.44,2937.38 2171.44,2974.9 v1(2171.81,2975.28) ; v1(2244.48,2899.02) 2244.78,2899.32 2244.78,2936.71 U3.1
  Bottom w10: TP1.1 2497.56,3025 JP1.1
VBUS_SENSE: R2.2 R4.1 TP4.1 U2.8 | length 406.1
  Top w10: v3(1989,2846) 1989,2991.12 1999.1,3001.22 2004.41,3001.22 2015.16,3011.97 U2.8 2015.16,2963.58 R2.2 R4.1
  Bottom w6: v3(1989,2846) 1989.5,2846.5 TP4.1
VDD: C5.1 C6.1 R3.1 TP5.1 U2.6 | length 666.2
  Top w10: v1(1630,2882) 1678.26,2882 C6.1 ; 1943.74,3078.74 U2.6@1967.99,3078.74
  Top w20: C6.1 1679.63,2882.38 1745.57,2882.38 C5.1@1746.06,2882.87 ; C5.1@1753.54,2881.89 1752.54,2881.89 1745.81,2888.62 1745.81,3030.25 1770.06,3054.49 1919.49,3054.49 1943.74,3078.74 ; C5.1@1766.16,2876.55 1800.61,2876.55 1835.63,2841.54 R3.1
  Bottom w10: TP5.1 1580.44,2894.56 1612.69,2894.56 1625.25,2882 v1(1630,2882)
pads on no net: AH1.1 AH2.1 J1. J1.A8 J1.B8 J1.SH1 J1.SH2 J1.SH3 J1.SH4 U2.1 U2.2 U2.10 U2.11 U2.12 U2.13 U2.14 U2.15 U2.16 U2.18 U2.19 U2.20 U2.21 U2.22 U2.27 U3.4

## Polygon pours and split planes (outlines as drawn)
GND on Bottom "GND_L02_P004" (solid, remove dead copper, pour order 4): 1088,2760 1088,3414 3295,3414 3295,2760
VBUS on Bottom "VBUS_L02_P001" (solid, remove dead copper, pour order 1): 2565,2944.88 2429.13,2944.88 2429.13,2901.57 2409.45,2881.89 2141.73,2881.89 2048.62,2975 1540,2975 1532.34,2982.66 1532.34,3023.66 1905.66,3023.66 1933,3051 2145,3051 2145,3182 1979.96,3182 1951.96,3210 1878.06,3210 1877.64,3209.58 1657.48,3208.33 1657.48,3250 2123.39,3250 2294.65,3078.74 2565,3078.74
GND on Top "GND_L01_P005" (solid, remove dead copper, pour order 5): 1088,2760 1088,3414 3295,3414 3295,2760

## Other copper
Top:
  rectangle net GND: 1515.04,3110.46 1561.04,3177.17
  rectangle net GND: 1448.09,2923.23 1486.22,2983.5
  rectangle net GND: 1427.17,3208.66 1466.54,3267.72
  pour cut-out: 1742.71,3165 1916.6,3165 1916.6,3085.09 1742.71,3085.09

## Silkscreen, mask and mechanical layers (free items; w line width, h text height)
Top Overlay:
  lines w5: 2935.99,3330.55 2935.99,3350.55 ; 2945.99,3320.55 2945.99,3360.55 ; 2955.99,3310.55 2955.99,3370.55 ; 2965.99,3300.55 2965.99,3380.55 ; 2965.99,3340.55 3015.99,3340.55
  text "ESP32 / UART" at 1127.11,3362.99 h26
  text "EPB HW ME" at 1127.11,3301.55 h30
  text "TXD" at 2790.34,3227 h26
  text "RXD" at 2790.34,3132 h26
  text "ENA/RTS/485" at 2741.7,3075.64 h26
  text "BOOT/CTS" at 2815.16,2885.72 h26
  text "PWR" at 2948.42,2817.56 h26
  text "V.1.4" at 1136.8,2792.12 h26
Bottom Overlay:
  text "GND" at 3107,3321.55 h35
  text "GND" at 1603,3321 h30
  text "DTR" at 2245,3282 h30
  text "TXD" at 3107,3225 h35
  text "RTS" at 2783,3152 h30
  text "RXD" at 3107,3125 h35
  text "ENA/RTS/485" at 3107,3021.55 h35
  text "VBUS" at 2350,3010 h30
  text "VBUS_SENSE" at 2121,2963 h30
  text "BOOT/CTS" at 3107,2921.55 h35
  text "VDD" at 1533,2881 h30
  text "POWER" at 3107,2821.55 h35
  text "RESET_N" at 1850,2810 h30
  text "+3.3V" at 2380,2808 h30
Board:
  text "Open source hardware." at 1100,3700 h150
  text "Feel free to copy, modify, and redistribute." at 1100,3579.29 h150
  text "Have fun." at 1100,3451.8 h150
  text "V.1.1 = layout improvement only" at 1088.11,2706.89 h26
  text "V.1.2 = OVERLAY CORRECTIONS" at 1088.11,2652.56 h26
  text "V.1.3 = added D2, D3" at 1090.11,2600.89 h26
  text "V.1.4 = J1, C1 and C2 altered" at 1090.11,2545.77 h26

## Text inside footprints (layer, text, board x,y; h text height)
J1: Mechanical 13 "PCB EDGE" at 1092.52,2887.8 h16 r270
JP1: Top Overlay "+3.3V" at 2398.11,2890.55 h26 r270; Top Overlay "VBUS" at 2398.11,3070.55 h26 r270
JP2: Top Overlay "CTS" at 2688.11,3160.55 h26 r270; Top Overlay "BOOT" at 2688.11,3395.55 h26 r270
JP3: Top Overlay "ENA" at 2403.11,3395.55 h26 r270; Top Overlay "RTS/485" at 2398.11,3245.55 h26 r270
JP4: Top Overlay "485" at 2688.11,2850.55 h26 r270; Top Overlay "RTS" at 2688.11,3070.55 h26 r270